# Altium PCB mixer_test.PcbDoc
Units mil, origin at the board's own origin, x right, y up, seen from the top; angles counter-clockwise.
Board outline 1528 x 1869 mil, 4 copper layers (Top Layer, Internal Plane 1, Internal Plane 2, Bottom Layer), stack 29.834 mil thick; 129 components, 64 nets, 342 pads, 250 vias.
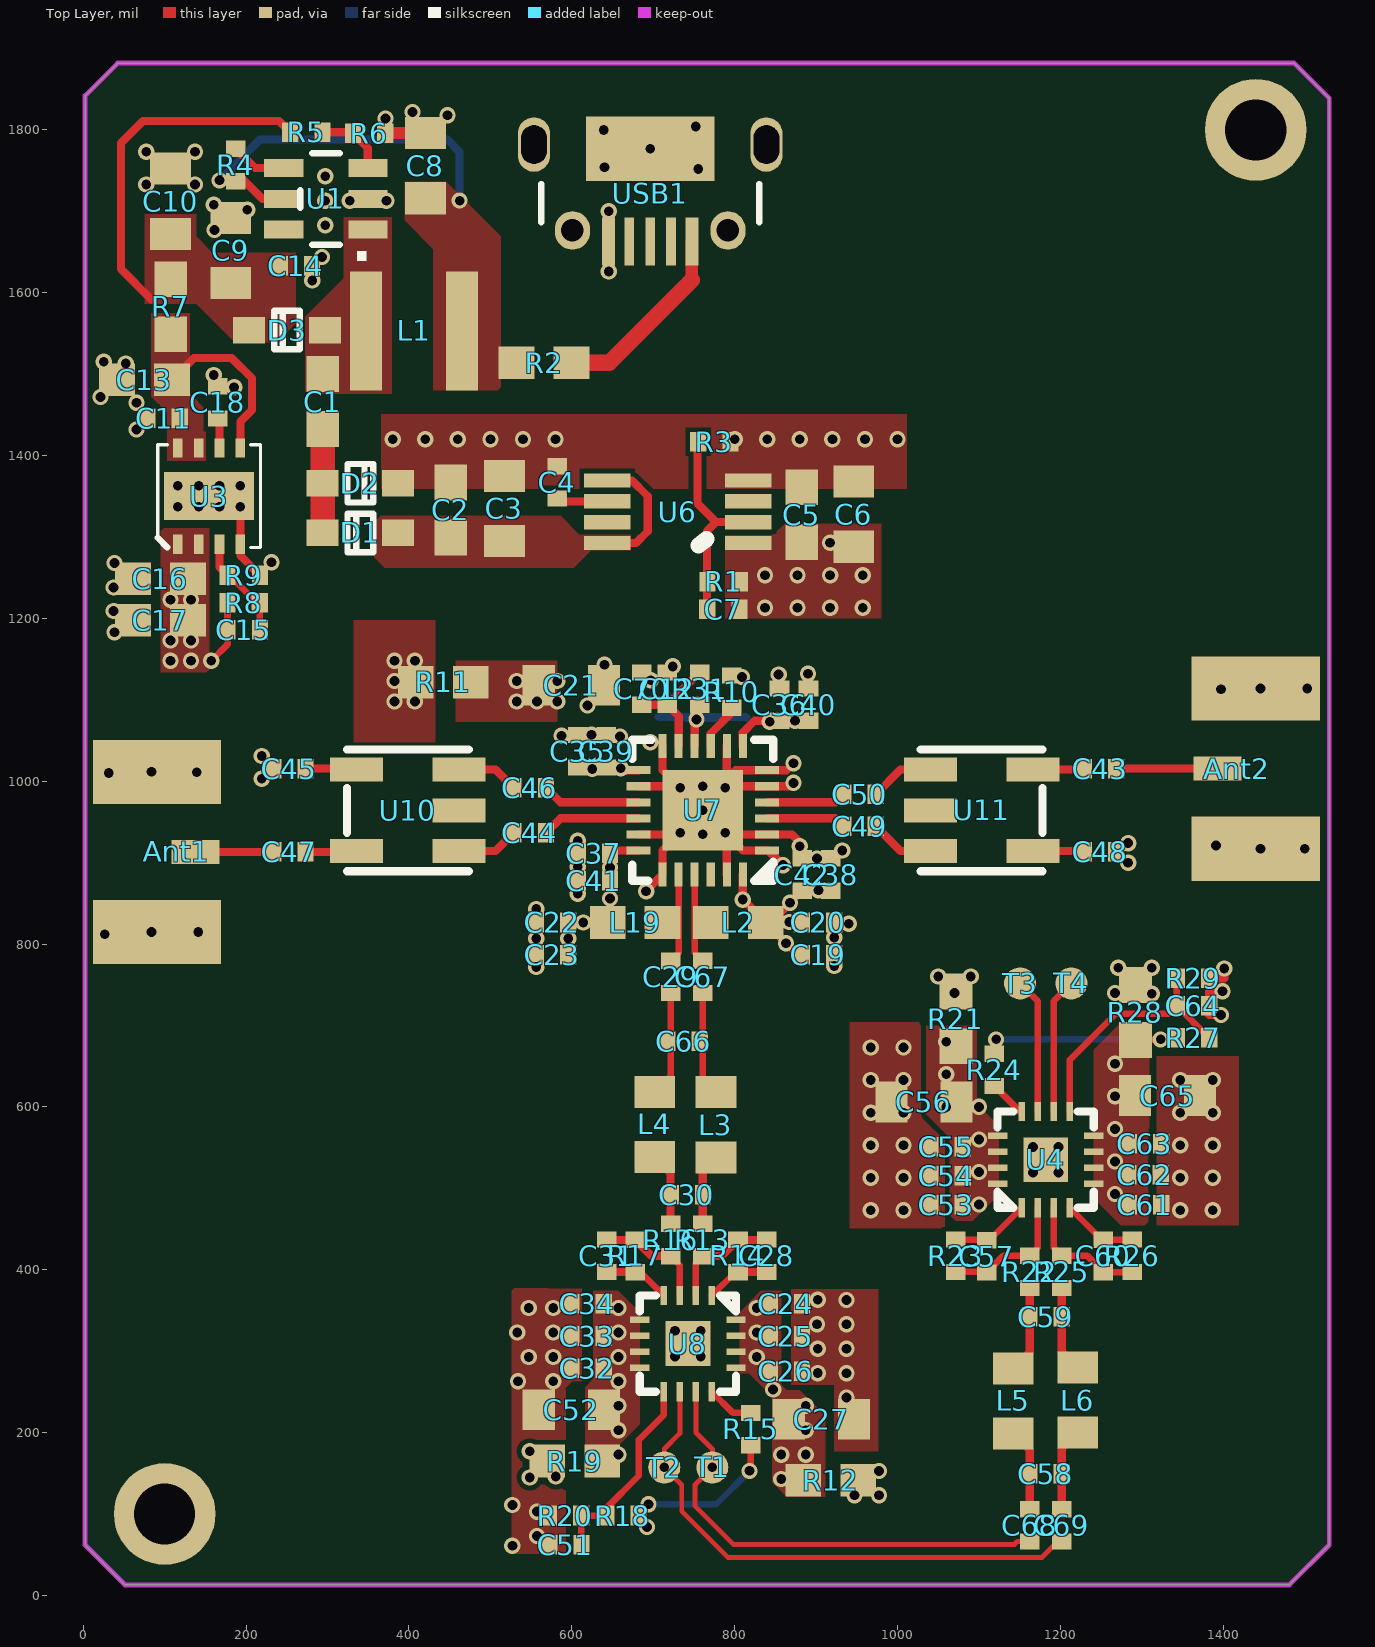
[diagram p0: Top Layer view]
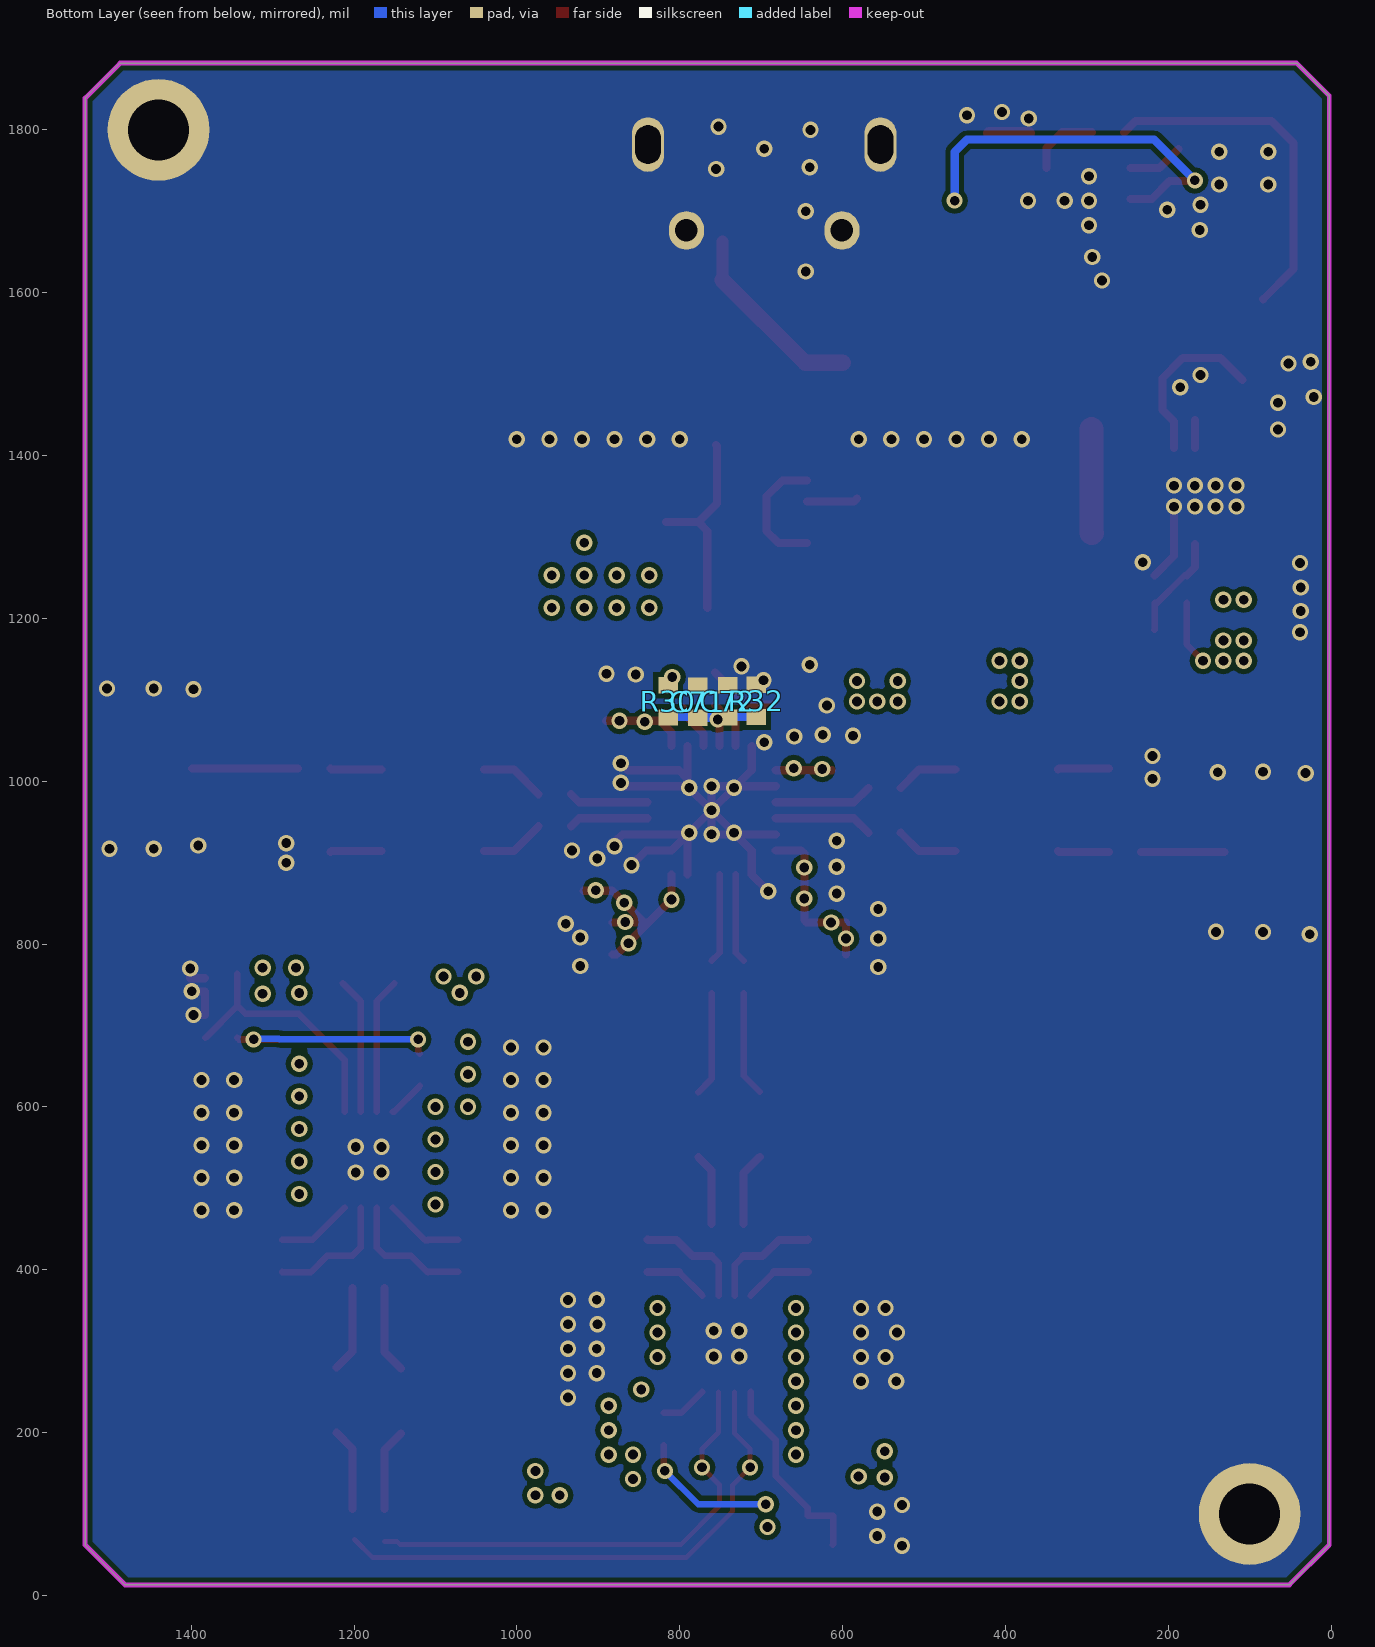
[diagram p1: Bottom Layer view, seen from below]
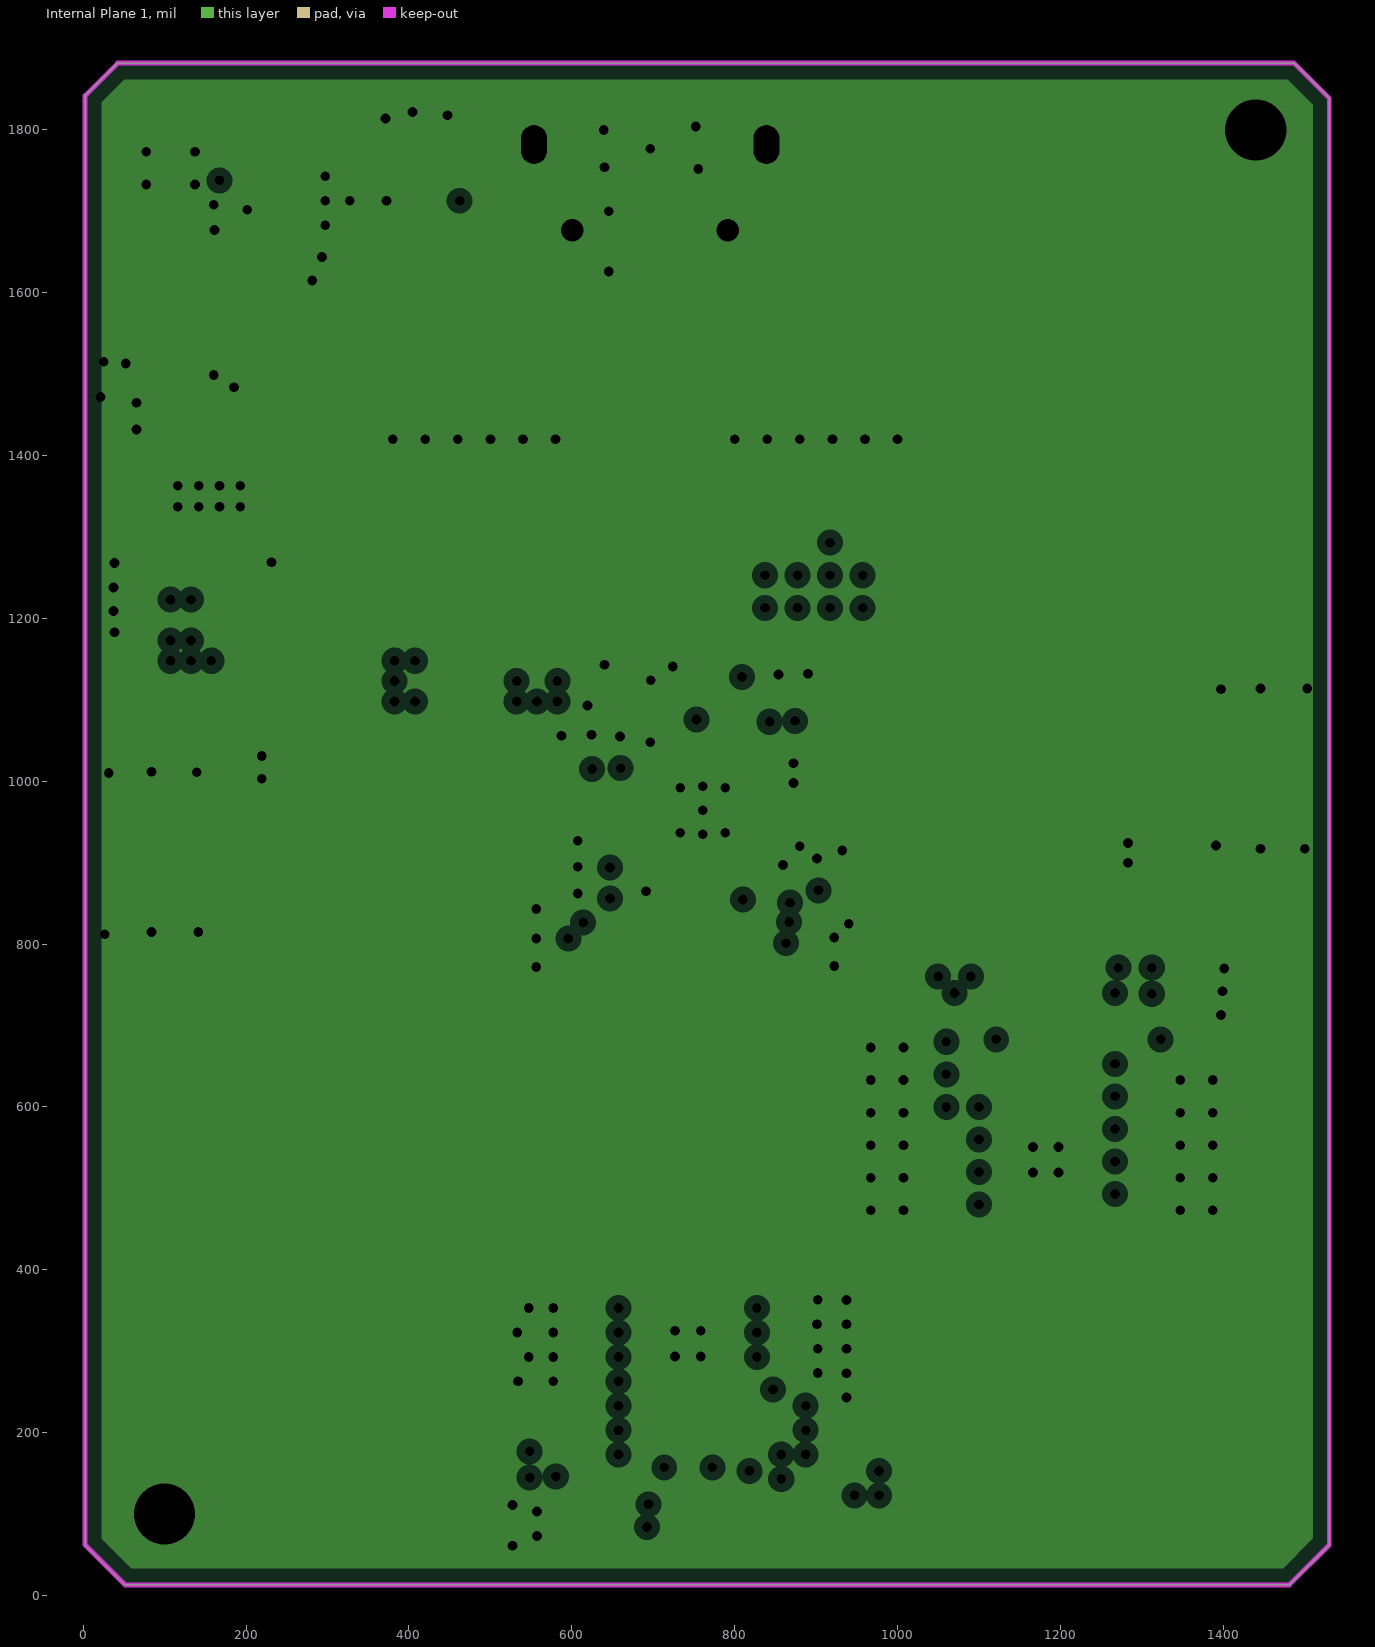
[diagram p2: Internal Plane 1, clearances drawn from the general rule]
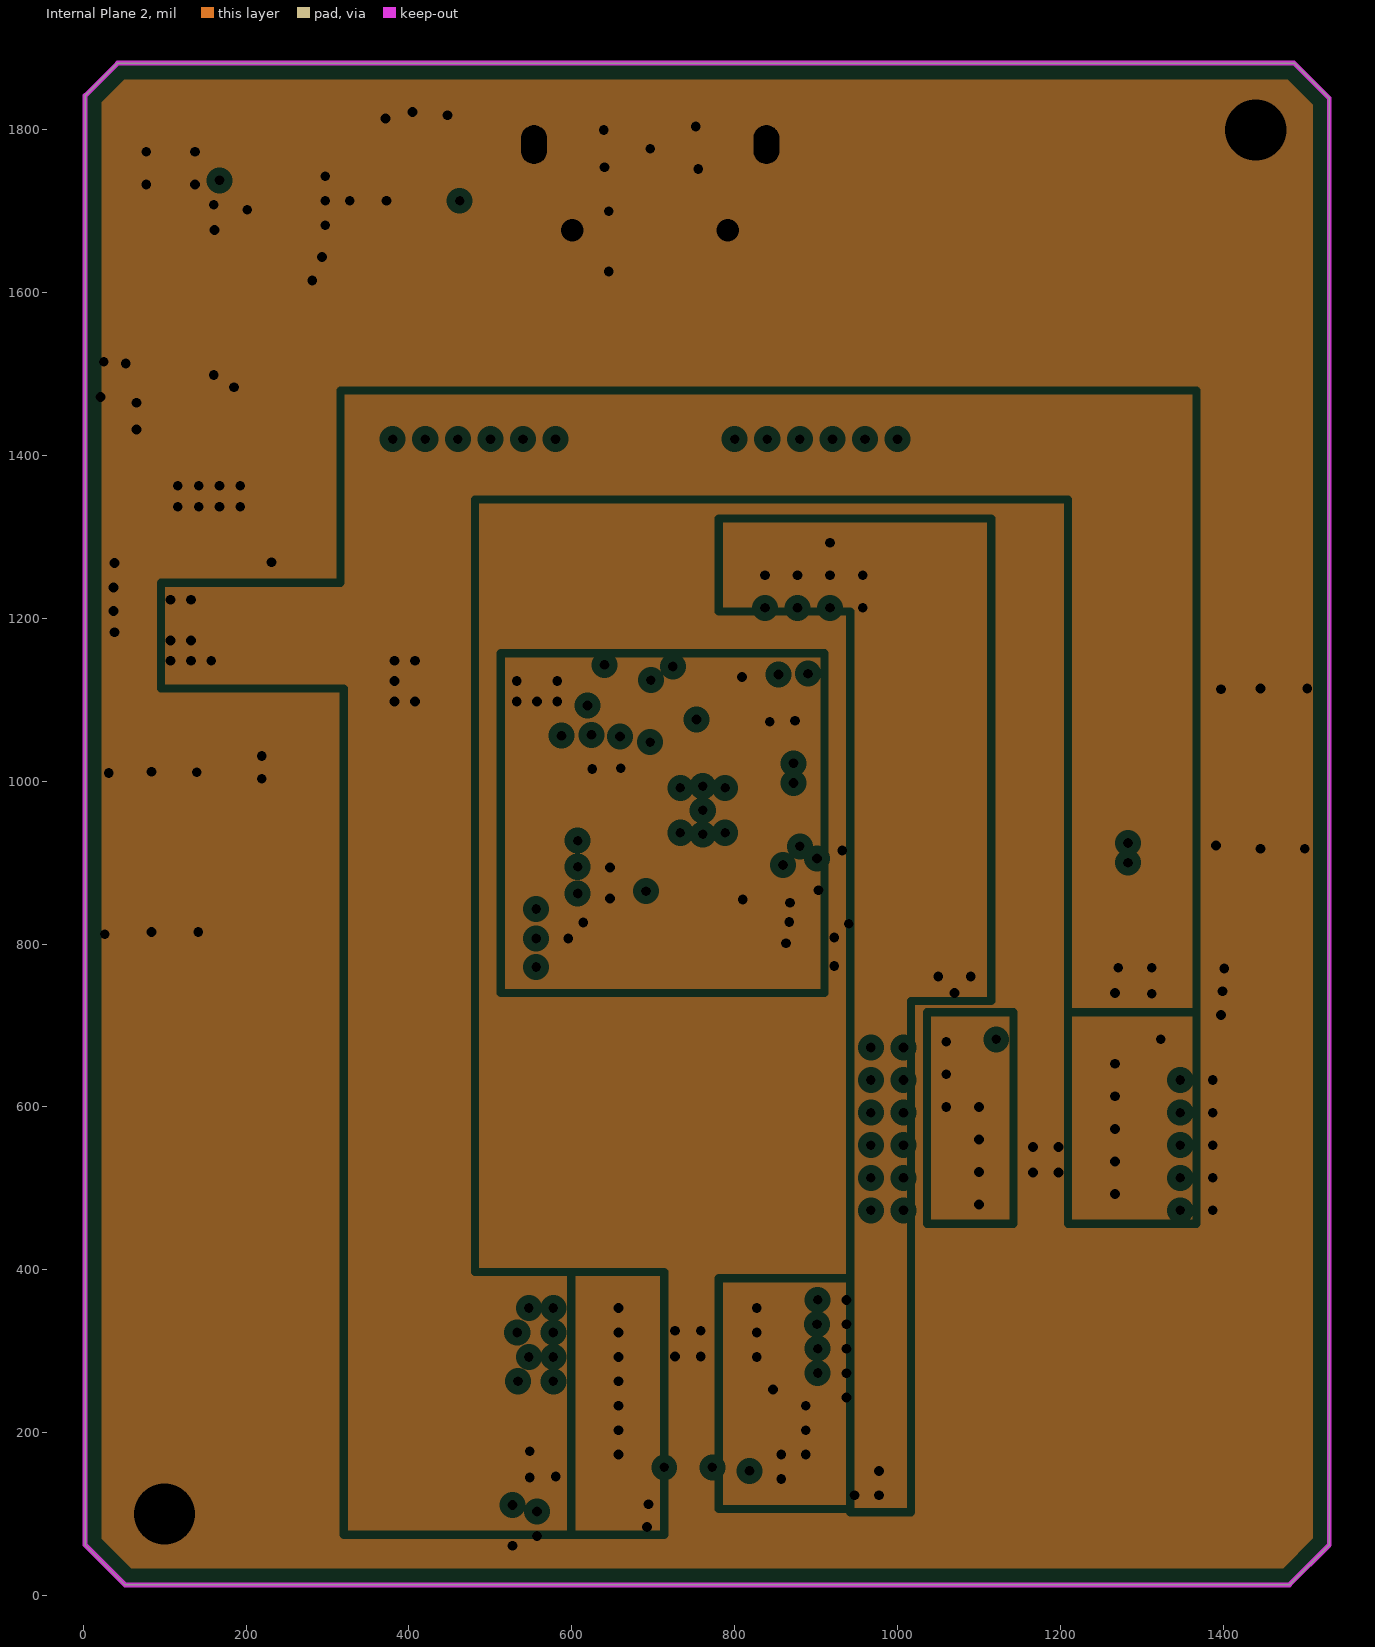
[diagram p3: Internal Plane 2, clearances drawn from the general rule]

## Layer stack, top to bottom
Top Solder: solder mask 0.4, Solder Resist, Dk 3.8
Top Layer: signal copper 1.4
Dielectric 1: prepreg 7.1, Dk 4.6
Internal Plane 1: plane copper 1.417, net GND
Dielectric 3: core 10, Dk 4.6
Internal Plane 2: plane copper 1.417, net GND
Dielectric 4: prepreg 7.1, Dk 4.6
Bottom Layer: signal copper 1.4
Bottom Solder: solder mask 0.4, Solder Resist, Dk 3.8

## Board outline
2.24,61.91 2.24,1841.91 42.24,1881.91 1487.24,1881.91 1530.24,1838.91 1530.24,61.91 1481.24,12.91 51.24,12.91

## Design rules (kind name [scope] priority, off if disabled: settings)
Clearance [All] p1: gap=6
DiffPairsRouting [All] p1: maxlimit=10 minlimit=10 mostfreqgap=10 toplayer_minwidth=5.98 toplayer_maxwidth=15 toplayer_prefwidth=15 bottomlayer_minwidth=5.98 bottomlayer_maxwidth=15 bottomlayer_prefwidth=15 maxuncoupledlength=500
MinimumSolderMaskSliver [All] p1 off: minsoldermaskwidth=10
PlaneClearance [All] p1: clearance=10
PlaneConnect [All] p1: planeconnectstyle=Direct reliefexpansion=20 reliefentries=4 reliefconductorwidth=10 reliefairgap=10
PolygonConnect [All] p1: connectstyle=Direct reliefconductorwidth=10 reliefentries=4 polygonreliefangle="90 Angle" airgapwidth=10
RoomDefinition mixer [InComponentClass('mixer')] p1 off: confinementstyle=ConfineIn formatcopy=TRUE lockcomponents=FALSE outline 2016.24,1719.91 7485.24,1719.91 7485.24,2114.91 2016.24,2114.91
RoomDefinition power [InComponentClass('power')] p2 off: confinementstyle=ConfineIn formatcopy=TRUE lockcomponents=FALSE outline 2012.24,72.91 4357.24,72.91 4357.24,312.91 2012.24,312.91
RoutingVias [All] p1: holewidth=12 width=20 viastyle="Through Hole" minholewidth=11.81 minwidth=19.68 maxholewidth=28 maxwidth=50
SilkToBoardRegionClearance [All] p1 off:
SilkToSilkClearance [All] p1 off: silktosilkclearance=10
SilkToSolderMaskClearance [IsPad] p1 off: minsilkscreentomaskgap=10 clearancetoexposedcopper=TRUE
SolderMaskExpansion [All] p1: expansion=4
UnpouredPolygon [All] p1: allowunpoured=FALSE
Width [All] p1: maxlimit=60 minlimit=6 preferedwidth=6
22 further rules are at their usual default settings.

## Classes and differential pairs
component class mixer: Ant1 Ant2 C12 C19 C20 C21 C22 C23 C24 C25 C26 C27 C28 C29 C30 C31 C32 C33 C34 C35 C36 C37 C38 C39 C40 C41 C42 C43 C44 C45 C46 C47 C48 C49 C50 C51 C52 C53 C54 C55 C56 C57 C58 C59 C60 C61 C62 C63 C64 C65 C66 C67 C68 C69 C70 C71 C72 L2 L3 L4 L5 L6 L19 R10 R11 R12 R13 R14 R15 R16 R17 R18 R19 R20 R21 R22 R23 R24 R25 R26 R27 R28 R29 R30 R31 R32 T1 T2 T3 T4 U4 U7 U8 U10 U11
component class power: C1 C2 C3 C4 C5 C6 C7 C8 C9 C10 C11 C13 C14 C15 C16 C17 C18 D1 D2 D3 L1 R1 R2 R3 R4 R5 R6 R7 R8 R9 U1 U3 U6 USB1
differential pair IF1: +IF1_P -IF1_N
differential pair IF2: +IF2_P -IF2_N

## Components (designator, comment, footprint, x,y, rotation, side; value= is the part's Value field where it differs from the comment)
Ant1 "Antenna" SMA-2 90.62,1011.5 r270 top
Ant2 "Antenna" SMA-2 1440,917.01 r90 top
C1 "1uF" 0603 294.24,1465.91 r90 top
C2 "0.1uF" 0603 451.24,1332.91 r90 top
C3 "10uF" 0805 517.24,1334.91 r270 top
C4 "10nF" 0402 582.24,1366.91 r90 top
C5 "0.1uF" 0603 882.24,1326.91 r90 top
C6 "10uF" 0805 946.24,1327.91 r270 top
C7 "10nF" 0402 786.24,1210.91 r180 top
C8 "10uF" 0805 420.24,1755.91 r270 top
C9 "10uF" 0805 181.24,1651.91 r270 top
C10 "10uF" 0805 107.24,1712.28 r270 top
C11 "0.1uF" 0402 98.49,1445.72 r0 top
C12 "0.1uF" 0402 717.48,1113.86 r270 top
C13 "2.2uF" 0603 74.87,1492.96 r0 top
C14 "0.1uF" 0402 261.24,1632.91 r180 top
C15 "470nF" 0402 196.91,1185.87 r0 top
C16 "0.1uF" 0603 94.55,1248.87 r0 top
C17 "2.2uF" 0603 94.55,1197.69 r0 top
C18 "470nF" 0402 165.42,1465.4 r270 top
C19 "10nF" 0402 902.52,787.09 r180 top
C20 "0.1uF" 0402 902.52,826.46 r180 top
C21 "10uF" 0805 599.37,1117.8 r180 top
C22 "10nF" 0402 575.75,826.46 r0 top
C23 "0.1uF" 0402 575.75,787.09 r0 top
C24 "0.1uF" 0402 863.15,357.95 r180 top
C25 "0.1uF" 0402 863.15,318.58 r180 top
C26 "10nF" 0402 863.15,275.28 r180 top
C27 "10uF" 0805 906.46,216.22 r0 top
C28 "18pF" 0402 839.53,417.01 r90 top
C29 "18pF" 0402 721.42,759.53 r90 top
C30 "270pF" 0402 741.1,491.81 r0 top
C31 "18pF" 0402 642.68,417.01 r90 top
C32 "0.1uF" 0402 619.06,279.21 r0 top
C33 "0.1uF" 0402 619.06,318.58 r0 top
C34 "10nF" 0402 619.06,357.95 r0 top
C35 "0.1uF" 0402 607.24,1036.91 r270 top
C36 "0.1uF" 0402 855.07,1094.17 r270 top
C37 "0.1uF" 0402 626.93,911.21 r0 top
C38 "0.1uF" 0402 918.27,885.51 r270 top
C39 "10nF" 0402 642.24,1036.91 r270 top
C40 "10nF" 0402 890.71,1094.17 r270 top
C41 "10nF" 0402 626.93,877.64 r0 top
C42 "10nF" 0402 882.83,885.51 r270 top
C43 "1nF" 0402 1248.98,1015.43 r180 top
C44 "1nF" 0402 548.19,936.69 r0 top
C45 "10nF" 0402 252.91,1015.43 r0 top
C46 "1nF" 0402 548.19,991.81 r0 top
C47 "1nF" 0402 252.91,913.07 r0 top
C48 "10nF" 0402 1248.98,913.07 r180 top
C49 "1nF" 0402 953.7,944.57 r180 top
C50 "1nF" 0402 953.7,983.94 r180 top
C51 "0.1uF" 0402 591.89,62.45 r0 top
C52 "10uF" 0805 599.37,228.03 r180 top
C53 "0.1uF" 0402 1060,480 r0 top
C54 "0.1uF" 0402 1060,515.43 r0 top
C55 "10nF" 0402 1060,550.87 r0 top
C56 "10uF" 0805 1032.44,605.98 r180 top
C57 "18pF" 0402 1109.52,416.61 r270 top
C58 "18pF" 0402 1182.05,149.29 r180 top
C59 "270pF" 0402 1182.05,342.2 r180 top
C60 "18pF" 0402 1252.91,417.01 r270 top
C61 "0.1uF" 0402 1304.09,480 r180 top
C62 "0.1uF" 0402 1303.7,516.67 r180 top
C63 "10nF" 0402 1304.09,554.8 r180 top
C64 "0.1uF" 0402 1363.15,724.09 r180 top
C65 "10uF" 0805 1331.65,613.86 r0 top
C66 "18pF" 0402 737.17,680.79 r0 top
C67 "18pF" 0402 760.79,759.53 r90 top
C68 "18pF" 0402 1162.36,86.3 r270 top
C69 "18pF" 0402 1201.73,86.3 r270 top
C70 "100pF" 0402 685.98,1113.86 r270 top
C71 "0.1uF" 0402 777.82,1097.96 r270 bottom
C72 "100pF" 0402 741.1,1098.11 r270 bottom
D1 "Diode 1N4148" LC-SOD-323 340.24,1304.91 r0 top
D2 "Diode 1N4148" LC-SOD-323 340.24,1365.91 r180 top
D3 "Diode" LC-SOD-323 250.24,1553.91 r0 top
L1 "10uH" L4015 465.24,1552.91 r180 top
L2 "Inductor" 0603 804.09,826.46 r0 top
L3 "Inductor" 0805 776.99,578.06 r270 top
L4 "Inductor" 0805 701.73,578.43 r270 top
L5 "Inductor" 0805 1142.22,238.77 r90 top
L6 "Inductor" 0805 1221.42,239.84 r90 top
L19 "Inductor" 0603 678.11,826.46 r180 top
R1 "17k" 0402 786.24,1244.91 r0 top
R2 "FB" 0603 566.24,1513.91 r180 top
R3 "10k" 0402 775.24,1416.91 r180 top
R4 "45k" 0402 187.24,1756.91 r270 top
R5 "91k" 0402 274.24,1796.91 r180 top
R6 "10k" 0402 351.24,1795.91 r180 top
R7 "FB" 0603 107.24,1582.36 r90 top
R8 "6.25k" 0402 196.8,1219.24 r0 top
R9 "10k" 0402 196.91,1252.8 r0 top
R10 "Res2" 0402 796.22,1109.92 r90 top
R11 "FB" 0603 441.89,1121.73 r0 top
R12 "FB" 0603 918.27,141.42 r180 top
R13 "Res2" 0402 760.79,436.69 r270 top
R14 "Res2" 0402 804.09,417.01 r270 top
R15 "Res2" 0402 819.84,204.41 r270 top
R16 "Res2" 0402 721.42,436.69 r270 top
R17 "Res2" 0402 678.11,417.01 r270 top
R18 "Res2" 0402 662.36,98.11 r0 top
R19 "FB" 0603 603.31,165.04 r0 top
R20 "Res2" 0402 591.5,98.11 r0 top
R21 "FB" 0603 1071.81,708.35 r270 top
R22 "Res2" 0402 1162.36,397.32 r90 top
R23 "Res2" 0402 1071.81,417.01 r90 top
R24 "Res2" 0402 1119.06,645.35 r90 top
R25 "Res2" 0402 1201.73,397.32 r90 top
R26 "Res2" 0402 1288.35,417.01 r90 top
R27 "Res2" 0402 1363.15,684.72 r180 top
R28 "FB" 0603 1292.28,716.22 r270 top
R29 "Res2" 0402 1363.24,757.91 r180 top
R30 "Res2" 0402 814.24,1097.91 r90 bottom
R31 "Res2" 0402 756.85,1113.86 r270 top
R32 "Res2" 0402 706.24,1098.91 r270 bottom
T1 "TestPad" "TestPad - 1mm" 772.6,157.17 r270 top
T2 "TestPad" "TestPad - 1mm" 713.54,157.17 r270 top
T3 "TestPad" "TestPad - 1mm" 1150.55,751.65 r270 top
T4 "TestPad" "TestPad - 1mm" 1213.54,751.65 r270 top
U1 "SY7152" SOT23-6 298.24,1714.91 r90 top
U3 "TPS7A8101" TPS7A8101 154.49,1350.08 r90 top
U4 "ADA4932-1" ADA4932-1 1182.05,535.12 r90 top
U6 "tps7a3001" MSOP8/VSSOP8 730.24,1330.91 r180 top
U7 "ADL5801" ADL5801 760.79,964.25 r180 top
U8 "ADA4932-1" ADA4932-1 742.48,309.21 r270 top
U10 "TCM1-1-13M+" TCM-63AX+ 398.58,964.25 r270 top
U11 "TCM1-1-13M+" TCM-63AX+ 1103.31,964.25 r90 top
USB1 "USB Micro Type B" MICRO-YZX 696.24,1892.91 r180 top

## Footprints (in the part's own frame and the unit in brackets; to place one, negate y for a bottom-side part, rotate by r counter-clockwise, add the part's x,y. Pads: shape width x height; smd on the part's side, far side on the other; paste and mask are expansions set on the pad)
0402 [mil] "0402-RES"
  rect 20x24 smd: 1(-19.69,0) 2(20,0)
0603 [mil] "0603-RES"
  rect 44x40 smd: 1(-33.46,0) 2(34,0)
0805 [mil]
  rect 39.37x50 smd: 1(-40,0) 2(40,0)
  body extent -50,-30 50,30, height 31
ADA4932-1 [mm]
  rect 1.4x1.4 smd: 0(0,0)
  rect 0.6x0.2 smd: 1(-1.5,0.75) 2(-1.5,0.25) 3(-1.5,-0.25) 4(-1.5,-0.75) 9(1.5,-0.75) 10(1.5,-0.25) 11(1.5,0.25) 12(1.5,0.75)
  rect 0.2x0.6 smd: 5(-0.75,-1.5) 6(-0.25,-1.5) 7(0.25,-1.5) 8(0.75,-1.5) 13(0.75,1.5) 14(0.25,1.5) 15(-0.25,1.5) 16(-0.75,1.5)
  silkscreen extent -1.5,-1.5 1.5,1.5, body extent -1.5,-1.5 1.5,1.5, height 0.7
ADL5801 [mm]
  rect 2.5x2.5 smd: 0(0,0)
  rect 0.75x0.25 smd: 1(-2,1.25) 2(-2,0.75) 3(-2,0.25) 4(-2,-0.25) 5(-2,-0.75) 6(-2,-1.25) 13(2,-1.25) 14(2,-0.75) 15(2,-0.25) 16(2,0.25) 17(2,0.75) 18(2,1.25)
  rect 0.25x0.75 smd: 7(-1.25,-2) 8(-0.75,-2) 9(-0.25,-2) 10(0.25,-2) 11(0.75,-2) 12(1.25,-2) 19(1.25,2) 20(0.75,2) 21(0.25,2) 22(-0.25,2) 23(-0.75,2) 24(-1.25,2)
  silkscreen extent -2.2,-2.2 2.2,2.2, body extent -2,-2 2,2, height 0.85
L4015 [mm]
  rect 1x3.7 smd: 1(0,0) 2(3,0)
LC-SOD-323 [mm]
  rect 1x0.83 smd: 1(1.18,0) 2(-1.18,0)
  silkscreen extent -0.4,-0.6 0.4,0.6, body extent -1.35,-0.62 1.35,0.63, height 1.1
MICRO-YZX [mm]
  rect 0.4x1.5 smd: 1(-1.3,5.85) 5(1.3,5.85)
  rect 0.3x1.5 smd: 2(-0.65,5.85) 3(0,5.85) 4(0.65,5.85)
  oval 1x1.7 hole 0.8 slot 1.2 at 90 deg: 5(-3.625,2.82) 5(3.625,2.82)
  oval 1.1x1.2 hole 0.7: 5(-2.425,5.5) 5(2.425,5.5)
  rect 4x2 smd: 5(0,2.95)
  silkscreen extent -3.4,4.05 3.4,5.25, body extent -4.02,0.33 3.98,5.93, height 2.6
MSOP8/VSSOP8 [mm]
  rect 1.45x0.45 smd: 1(-2.2,0.975) 2(-2.2,0.325) 3(-2.2,-0.325) 4(-2.2,-0.975) 5(2.2,-0.975) 6(2.2,-0.325) 7(2.2,0.325) 8(2.2,0.975)
  silkscreen extent -0.9,0.85 -0.65,1.05
SMA-2 [mm]
  rect 0.75x1.5 smd: 1(2.5,1.2)
  rect 2x4 smd: GND(0,0) GND(5,0)
  Top Layer pour cut-out: 1,2 4,2 4,-2 1,-2
SOT23-6 [mil] "SOT23-5"
  rect 22x48 smd: 1(-37.4,-51.18) 2(0,-51.18) 3(38,-51.18) 4(38,52) 5(0,52.01) 6(-37.4,52)
  silkscreen extent -76,-50 56,32
TCM-63AX+ [mm]
  rect 0.75x1.65 smd: 1(-1.27,1.6) 2(0,1.6) 3(1.27,1.6) 4(1.27,-1.6) 5(-1.27,-1.6)
  silkscreen extent -1.9,-1.9 1.9,1.9
"TestPad - 1mm" [mm]
  round 1 smd: 1(0,0)
TPS7A8101 [mm]
  rect 1.5x2.8 smd: 0(0,0)
  rect 0.6x0.3 smd: 1(-1.5,0.975) 2(-1.5,0.325) 3(-1.5,-0.325) 4(-1.5,-0.975) 5(1.5,-0.975) 6(1.5,-0.325) 7(1.5,0.325) 8(1.5,0.975)
  silkscreen extent -1.6,-1.6 1.6,1.6, body extent -1.5,-1.5 1.5,1.5, height 0.6

## Part data
C1 C2 C3 C4 C5 C6 C7 C8 C9 C10 C15 C21 C27 C52 C56 C65: library part Cap, "Capacitor"
C11 C12 C13 C14 C16 C17 C18 C19 C20 C22 C23 C24 C25 C26 C28 C29 C30 C31 C32 C33 C34 C35 C36 C37 C38 C39 C40 C41 C42 C43 C44 C45 C46 C47 C48 C49 C50 C51 C53 C54 C55 C57 C58 C59 C60 C61 C62 C63 C64 C66 C67 C68 C69 C70 C71 C72: library part CAP0402-CAP, "<b>Capacitor</b> / Standard 0603 ceramic capacitor, and 0.1\" leaded capacitor."
D1 D2: "High Conductance Fast Diode"
D3: "Default Diode"
L1: library part Inductor, "Inductor"
R1 R2 R3 R4 R5 R6 R7 R8 R9 R11 R12 R19 R21 R28: library part Res2, "Resistor"
R10 R13 R14 R15 R16 R17 R18 R20 R22 R23 R24 R25 R26 R27 R29 R30 R31 R32: "Resistor"
U10 U11: library part TCM-63AX+
USB1: library part USB_Micro_TypeB, "Connector SMD USB Micro Type B middle mount"

## Free pads (board coordinates)
  round 125 hole 75: 0(100,100) 1(1440,1800)

## Via types
v1: diameter 20, hole 12, Top Layer to Bottom Layer, tented both sides, 235 vias
v2: diameter 19.68, hole 11.81, Top Layer to Bottom Layer, tented both sides, 15 vias

## Nets (pads, with @x,y where several pads share a name; then routed paths per layer and width w, separated by ;. In a path a pad name is that pad's centre, name@x,y a point inside that pad or via, vN(x,y) a via of type N, cw(c..) or ccw(c..) an arc to the next point about the centre after c; other vN are vias at no path point)
5V: C15.1 C16.2 C17.2 R8.1 R11.1 R19.1 R28.1 U3.1 U3.2 | length 79.7
  Top Layer w8: v1(157.24,1147.91) 177.23,1167.9 C15.1 177.12,1185.98 R8.1
  other v1: 548.24,144.91 580.24,145.91 548.24,176.91 1312.24,738.91 1267.24,739.91 1271.24,770.91 1312.24,770.91 382.24,1097.91 407.24,1097.91 382.24,1122.91 107.24,1147.91 132.24,1147.91 382.24,1147.91 407.24,1147.91 107.24,1172.91 132.24,1172.91 107.24,1222.91 132.24,1222.91
5V-MIXER: C19.2 C20.2 C21.2 C22.2 C23.2 C35.2 C36.2 C37.2 C38.2 C39.2 C40.2 C41.2 C42.2 L2.2 L19.2 R10.2 R11.2 R30.2 U7.7 U7.13 U7.18 U7.24 | length 649.5
  Top Layer w10: C23.2 C22.2 L19.2 646.93,829.28 C37.2 650.76,915.04 U7.18 ; C35.2@612.83,1013.46 U7.13 ; U7.24 v1(810,854.55) L2.2 ; U7.7 810,1059.67 824.5,1074.17 C40.2 ; C19.2 877.46,787.09 L2.2 ; C20.2 L2.2@843.78,826.46 ; C38.2 C42.2 L2.2@843.78,826.46 ; L2.2 L2.2@843.78,826.46
  other v1: 863,801 595.75,806.77 614,826.46 867,827 868,850.68 647,856 903,866 646.93,894 625,1015 660,1016 843,1073 874,1074.17 532.24,1097.91 557.24,1097.91 582.24,1097.91 532.24,1122.91 582.24,1122.91 809,1128
5VA: C32.2 C33.2 C34.2 C52.1 R15.2 R18.2 R19.2 U8.5 U8.6 U8.7 U8.8 | length 173.1
  Top Layer w8: v2(818.24,152.91) 819.84,154.51 R15.2
  Bottom Layer w8: v1(694.24,111.91) 777.24,111.91 v2(818.24,152.91)
  other v1: 692.24,83.91 657.24,172.91 657.24,202.91 657.24,232.91 657.24,262.91 657.24,292.91 657.24,322.91 657.24,352.91
5VB: C61.2 C62.2 C63.2 C65.1 R24.2 R27.2 R28.2 U4.5 U4.6 U4.7 U4.8 | length 291.3
  Top Layer w8: R24.2 1121.24,667.54 v2(1121.24,682.91) ; R28.2 1340.65,682.22 R27.2@1341.34,682.91 ; v2(1323.24,682.91) R27.2@1341.34,682.91 ; R27.2 R27.2@1341.34,682.91
  Bottom Layer w8: v2(1121.24,682.91) 1291.24,682.91 1292.24,683.91 1322.24,683.91 v2(1323.24,682.91)
  other v1: 1267.24,492.91 1267.24,532.91 1267.24,572.91 1267.24,612.91 1267.24,652.91
6V: C9.2 C10.2 C14.2 D3.2 R5.2 R7.2 | length 432.3
  Top Layer w10: 83.24,1591.91 46.24,1628.91 46.24,1783.91 73.24,1810.91 240.24,1810.91 R5.2
-3.3V: C5.1 C6.2 C7.1 R1.2 R12.1 R21.1 U6.1
  other v1: 947.24,122.91 977.24,122.91 977.24,152.91 1070,740 1050,760 1090,760 837.24,1212.91 877.24,1212.91 917.24,1212.91 957.24,1212.91 837.24,1252.91 877.24,1252.91 917.24,1252.91 957.24,1252.91 917.24,1292.91
DETO: C12.2 C70.2 R31.1 U7.11 | length 144.1
  Top Layer w10: C70.2 C12.2 ; U7.11 731.26,1080.08 C12.2 ; R31.1 717.48,1094.17 C12.2
GND: Ant1.GND Ant2.GND C2.2 C3.1 C4.2 C5.2 C6.1 C8.1 C9.1 C10.1 C11.1 C12.1 C13.1 C14.1 C16.1 C17.1 C18.1 C19.1 C20.1 C21.1 C22.1 C23.1 C24.1 C25.1 C26.1 C27.2 C32.1 C33.1 C34.1 C35.1 C36.1 C37.1 C38.1 C39.1 C40.1 C41.1 C42.1 C45.1 C48.1 C51.1 C52.2 C53.1 C54.1 C55.1 C56.2 C61.1 C62.1 C63.1 C64.1 C65.2 C70.1 C71.1 C72.1 D2.2 pad.0 pad.1 R3.1 R6.1 R9.2 R20.1 R29.1 R32.1 U1.2 U3.0 U3.4 U4.0 U6.4 U7.0 U7.1 U7.2 U7.5 U7.6 U7.8 U7.12 U7.14 U7.17 U7.19 U7.23 U8.0 USB1.5 | length 1216.5
  Top Layer w10: v2(192.87,1337.28) U3.4 192.87,1276.84 R9.2 ; U7.17 U7.0@731.26,934.72 ; U7.14 U7.0@731.26,993.78 ; v1(691.24,864.91) 711.57,885.24 U7.19 711.57,915.04 U7.0@731.26,934.72 ; U7.12 711.57,1013.46 U7.0@731.26,993.78 ; U7.23 U7.0@790.32,934.72 ; U7.8 U7.0@790.32,1002.91 ; v1(859.24,896.91) 841.12,915.04 U7.1 810,915.04 U7.0@790.32,934.72 ; v1(872.24,997.91) 868.11,993.78 U7.5 U7.0@790.32,993.78 ; v1(872.24,1021.91) 863.8,1013.46 U7.6 800.87,1013.46 U7.0@790.32,1002.91 ; v1(880,920) 880,925.16 870.43,934.72 U7.2 U7.0@790.32,934.72 ; R29.1 1401.24,757.91 v1(1401.24,769.91) ; v1(1397.24,712.91) 1382.83,712.91 C64.1 1382.83,741.91 v1(1399.24,741.91) ; U7.0@731.26,934.72 v1(760.79,934.72) v1(760.79,964.25) ; U7.0@731.26,934.72 v1(733.23,936.69) v1(760.79,964.25) ; U7.0@731.26,993.78 v1(760.79,993.78) v1(760.79,964.25) ; U7.0@731.26,993.78 v1(733.23,991.81) v1(760.79,964.25) ; v1(760.79,964.25) v1(788.35,936.69) U7.0@790.32,934.72 ; v1(760.79,964.25) v1(788.35,991.81) U7.0@790.32,993.78 ; U7.0@790.32,993.78 U7.0@790.32,1002.91
  Top Layer w15: R6.1 C8.1
  other v1: 527,61 557.24,72.91 557.24,102.91 527,111 937.24,242.91 534,263 577.24,262.91 902,273 937.24,272.91 547.24,292.91 577.24,292.91 726.73,293.46 758.23,293.46 902,303 937.24,302.91 533,323 577.24,322.91 726.73,324.96 758.23,324.96 901,333 937.24,332.91 547.24,352.91 577.24,352.91 902,363 937.24,362.91 967.24,472.91 1007.24,472.91 1347.24,472.91 1387.24,472.91 967.24,512.91 1007.24,512.91 1347.24,512.91 1387.24,512.91 1166.3,519.37 1197.8,519.37 1166.3,550.87 1197.8,550.87 967.24,552.91 1007.24,552.91 1347.24,552.91 1387.24,552.91 967.24,592.91 1007.24,592.91 1347.24,592.91 1387.24,592.91 967.24,632.91 1007.24,632.91 1347.24,632.91 1387.24,632.91 967.24,672.91 1007.24,672.91 556.24,771.91 922.24,772.91 556.24,806.91 922.24,807.91 26.24,811.91 83.62,814.65 141.24,814.91 940,825 556.24,842.91 607.24,861.91 607.24,894.91 1283.24,899.91 901.24,904.91 932.24,914.91 1445.83,917.01 1500.24,916.91 1391.24,920.91 1283.24,923.91 607.24,926.91 219.24,1002.91 31.24,1009.91 139.24,1010.91 83.62,1011.5 219.24,1030.91 696.24,1047.91 659.24,1054.91 587.24,1055.91 624.24,1056.91 619.24,1092.91 1397.24,1112.91 1445.83,1113.86 1503.24,1113.91 697,1124 854,1131 890,1132 724,1141 640.24,1142.91 38.24,1182.91 37.24,1208.91 37.24,1237.91 38.24,1267.91 231.24,1268.91 380,1420 420,1420 460,1420 500,1420 540,1420 580,1420 800,1420 840,1420 880,1420 920,1420 960,1420 1000,1420 65.24,1431.91 65.24,1464.91 21.24,1471.91 185.24,1483.91 160.24,1498.91 52.24,1512.91 25,1515 281.24,1614.91 645.24,1625.91 293.24,1643.91 161.24,1676.91 297.24,1682.91 645.24,1699.91 201.24,1701.91 160.24,1707.91 297.24,1712.91 327.24,1712.91 372.24,1712.91 77.24,1732.91 137.24,1732.91 297.24,1742.91 755.24,1751.91 640.24,1753.91 77.24,1772.91 137.24,1772.91 696.24,1776.77 639.24,1799.91 752.24,1803.91 371.24,1813.91 447.24,1817.91 404.24,1821.91
  other v2: 116.1,1337.28 141.69,1337.28 167.28,1337.28 116.1,1362.87 141.69,1362.87 167.28,1362.87 192.87,1362.87
IF1_N: C29.2 L19.1 U7.20 | length 110.1
  Top Layer w8: C29.2 731.26,789.37 U7.20
IF1_P: C67.2 L2.1 U7.21 | length 110.1
  Top Layer w8: U7.21 750.94,789.37 C67.2
IF2_N: C68.2 T1.1 U8.11 | length 589.9
  Top Layer w6: U8.11 752.32,200.13 772.6,179.85 v2(772.6,157.17) 751.07,135.64 751.07,109.92 798.32,62.68 1143.74,62.68 1147.36,66.3 C68.2
IF2_P: C69.2 T2.1 U8.10 | length 660.6
  Top Layer w6: U8.10 732.64,198.94 713.54,179.85 v2(713.54,157.17) 735.07,135.64 735.07,103.29 791.69,46.68 1177.47,46.68 C69.2@1199.41,68.62
IF3+: T4.1 U4.10 | length 166.4
  Top Layer w8: U4.10 1191.89,730 T4.1
IF3-: T3.1 U4.11 | length 166.4
  Top Layer w8: T3.1 1172.2,730 U4.11
NetAnt1_1: Ant1.1 C47.1 | length 102.4
  Top Layer w10: Ant1.1@130.87,913.07 C47.1
NetAnt2_1: Ant2.1 C43.1 | length 129.9
  Top Layer w10: C43.1 Ant2.1@1398.58,1015.43
NetC1_1: C1.1 D1.2 D2.1 | length 127.7
  Top Layer w30: D1.2 294.24,1305.37 C1.1
NetC1_2: C1.2 D3.1 L1.2 U1.1
NetC2_1: C2.1 C3.2 D1.1 U6.5 U6.8 | length 156.2
  Top Layer w10: U6.8 678.86,1292.53 693.24,1306.91 693.24,1349.91 673.86,1369.3 U6.5
NetC4_1: C4.1 U6.6 | length 62.8
  Top Layer w10: C4.1 585.76,1343.71 U6.6
NetC7_2: C7.2 R1.1 R3.2 U6.2 | length 254.4
  Top Layer w10: R3.2@755.24,1412.91 754.24,1411.91 754.24,1340.91 777.04,1318.12 ; C7.2@765.8,1212.85 766.12,1213.17 766.12,1247.85 766.12,1307.2 777.04,1318.12 ; U6.2 777.04,1318.12
NetC11_2: C11.2 C13.2 R7.1 U3.5 U3.7 U3.8 | length 211.6
  Top Layer w10: C13.2 135.82,1519.91 182.24,1519.91 207.24,1494.91 207.24,1455.91 192.87,1441.54 U3.5
NetC15_2: C15.2 R8.2 R9.1 U3.3 | length 128.2
  Top Layer w8: R9.1 179.7,1252.8 R8.2@215.03,1217.47 ; R8.2 216.8,1185.98 C15.2
  Top Layer w10: U3.3 167.28,1262.75 R9.1
NetC18_2: C18.2 U3.6 | length 34.4
  Top Layer w10: U3.6 C18.2@167.28,1443.54
NetC24_2: C24.2 C25.2 C26.2 C27.1 R12.2 U8.13 U8.14 U8.15 U8.16
  other v1: 857.24,142.91 857.24,172.91 887.24,172.91 887.24,202.91 887.24,232.91 847.24,252.91 827.24,292.91 827.24,322.91 827.24,352.91
NetC28_1: C28.1 R14.2 U8.1 | length 79.6
  Top Layer w8: U8.1 R14.2@800.75,397.01
  Top Layer w10: R14.2@800.75,397.01 R14.2 839.21,397.01 C28.1
NetC28_2: C28.2 R13.2 R14.1 U8.2 | length 139.1
  Top Layer w8: U8.2 752.32,408.23 R13.2
  Top Layer w10: R13.2 784.09,416.69 R14.1 839.21,436.69 C28.2
NetC29_1: C29.1 C66.1 L4.1 | length 129.6
  Top Layer w8: L4.1 721.42,638.11 C29.1
NetC30_1: C30.1 L4.2 R16.1 | length 90.2
  Top Layer w10: L4.2 721.42,518.74 C30.1 R16.1
NetC30_2: C30.2 L3.2 R13.1 | length 88.4
  Top Layer w10: R13.1 760.79,521.86 L3.2
NetC31_1: C31.1 R17.2 U8.4 | length 82.3
  Top Layer w8: R17.2@684.21,397.01 U8.4
  Top Layer w10: C31.1 642.99,397.01 R17.2 R17.2@684.21,397.01
NetC31_2: C31.2 R16.2 R17.1 U8.3 | length 140.2
  Top Layer w8: R16.2 732.64,405.47 U8.3
  Top Layer w10: C31.2 642.99,436.69 R17.1 698.11,416.69 R16.2
NetC43_2: C43.2 U11.4 | length 63.2
  Top Layer w10: U11.4 1227.8,1014.25 C43.2
NetC44_1: C44.1 U10.3 | length 76.2
  Top Layer w10: U10.3 506.06,914.25 C44.1
NetC44_2: C44.2 U7.16 | length 121.2
  Top Layer w10: C44.2 585.91,954.41 U7.16
NetC45_2: C45.2 U10.5 | length 63.2
  Top Layer w10: C45.2 334.41,1015.43 U10.5
NetC46_1: C46.1 U10.1 | length 76.2
  Top Layer w10: U10.1 506.06,1014.25 C46.1
NetC46_2: C46.2 U7.15 | length 121.2
  Top Layer w10: C46.2 585.91,974.09 U7.15
NetC47_2: C47.2 U10.4 | length 63.2
  Top Layer w10: C47.2 334.41,913.07 U10.4
NetC48_2: C48.2 U11.5 | length 63.2
  Top Layer w10: U11.5 1227.8,914.25 C48.2
NetC49_1: C49.1 U11.1 | length 79.5
  Top Layer w10: C49.1 1003.7,914.25 U11.1
NetC49_2: C49.2 U7.3 | length 98.3
  Top Layer w10: U7.3 923.86,954.41 C49.2
NetC50_1: C50.1 U11.3 | length 79.5
  Top Layer w10: C50.1 1003.7,1014.25 U11.3
NetC50_2: C50.2 U7.4 | length 98.3
  Top Layer w10: U7.4 923.86,974.09 C50.2
NetC51_2: C51.2 R18.1 R20.2 U8.9 | length 248.2
  Top Layer w8: C51.2 611.5,62.84 R20.2 R18.1 642.68,107.35 682.24,146.91 682.24,190.91 712.95,221.62 U8.9
NetC53_2: C53.2 C54.2 C55.2 C56.1 R21.2 U4.13 U4.14 U4.15 U4.16
  other v1: 1100,480 1100,520 1100,560 1060,600 1100,600 1060,640 1060,680
NetC57_1: C57.1 R23.2 U4.1 | length 97.5
  Top Layer w8: R23.2 1108.81,437.01 C57.1 1112.76,436.3 U4.1
NetC57_2: C57.2 R22.2 R23.1 U4.2 | length 162.2
  Top Layer w8: R23.1 1108.81,397.32 C57.2 1130.23,417.32 R22.2 1172.2,427.17 U4.2
NetC58_1: C58.1 C69.1 L6.1 | length 102
  Top Layer w10: C69.1 1201.73,180.16 L6.1
NetC58_2: C58.2 C68.1 L5.1 | length 101.1
  Top Layer w10: L5.1 1162.36,178.63 C68.1
NetC59_1: C59.1 L6.2 R25.1 | length 105.9
  Top Layer w10: R25.1 1201.73,299.53 L6.2
NetC59_2: C59.2 L5.2 R22.1 | length 107.2
  Top Layer w10: L5.2 1162.36,298.91 R22.1
NetC60_1: C60.1 R26.2 U4.4 | length 93.2
  Top Layer w8: U4.4 1250.94,436.69 C60.1 1288.03,436.69 R26.2
NetC60_2: C60.2 R25.2 R26.1 U4.3 | length 158
  Top Layer w8: U4.3 1191.89,427.17 R25.2 1232.6,417.32 C60.2 1288.03,397.01 R26.1
NetC64_2: C64.2 R27.1 R29.2 U4.9 | length 317.9
  Top Layer w8: U4.9 1211.57,657.65 1268.14,714.22 1333.28,714.22 C64.2 ; R29.2@1343.15,763.46 C64.2 ; R27.1 1382.52,684.72 C64.2
NetC66_2: C66.2 C67.1 L3.1 | length 128.5
  Top Layer w8: C67.1 760.79,634.27 L3.1
NetR2_1: R2.1 USB1.1 | length 236.9
  Top Layer w15: 747.43,1615.41 USB1.1
  Top Layer w20: R2.1 645.93,1513.91 747.43,1615.41
NetR4_1: R4.1 U1.4 | length 68.8
  Top Layer w10: R4.1 210.93,1752.91 U1.4
NetR5_1: R5.1 R6.2 U1.3 | length 88.3
  Top Layer w10: R5.1 330.24,1796.91 R6.2 349.43,1777.73 U1.3
NetR10_1: R10.1 U7.9 | length 57.8
  Top Layer w10: U7.9 770.63,1058.55 796.22,1084.14 R10.1
NetR15_1: R15.1 U8.12 | length 58.6
  Top Layer w8: U8.12 798.07,224.09 R15.1
NetR24_1: R24.1 U4.12 | length 46.5
  Top Layer w8: R24.1 1150.55,594.17 U4.12
VSET: C71.2 C72.2 R30.1 R31.2 R32.2 U7.10 | length 198.4
  Top Layer w10: U7.10 750.94,1087.95 R31.2
  Bottom Layer w10: R32.2 813.56,1078.91 R30.1 ; C72.2 741.25,1077.96 C71.2
  other v1: 753.24,1075.91
VSYS: C8.2 L1.1 R2.2 R4.2 U1.5 | length 470.4
  Top Layer w10: v2(167.24,1737.91) 168.24,1736.91 R4.2 198.24,1736.91 220.24,1714.91 U1.5
  Bottom Layer w10: v2(167.24,1737.91) 217.24,1787.91 447.24,1787.91 462.24,1772.91 v2(462.24,1712.91)
pads on no net: U1.6 U6.3 U6.7 U7.22 U10.2 U11.2 USB1.2 USB1.3 USB1.4

## Polygon pours and split planes (outlines as drawn)
GND on Top Layer "Bottom Layer-No Net" (solid, remove dead copper, pour order 44): 1318.24,454.91 1318.24,661.91 1419.24,661.91 1419.24,454.91
5VB on Top Layer "Bottom Layer-No Net" (solid, remove dead copper, pour order 42): 1241.24,487.91 1274.24,454.91 1309.24,454.91 1309.24,701.91 1273.24,701.91 1241.24,669.91
GND on Top Layer "Bottom Layer-No Net" (solid, remove dead copper, pour order 40): 941.24,703.91 941.24,449.91 941.24,450.91 1058.24,450.91 1058.24,703.91
NetC53_2 on Top Layer "Bottom Layer-No Net" (solid, remove dead copper, pour order 38): 1035.24,699.91 1035.24,590.91 1064.24,561.91 1064.24,472.91 1064.24,466.91 1071.24,459.91 1088.24,459.91 1092.24,459.91 1124.24,491.91 1124.24,576.91 1098.24,602.91 1097.24,603.91 1097.24,699.91
GND on Top Layer "Bottom Layer-No Net" (solid, remove dead copper, pour order 32): 366.24,1450.91 976.24,1450.91 1011.24,1450.91 1011.24,1367.91 1011.24,1358.91 366.24,1358.91
GND on Top Layer "Bottom Layer-No Net" (solid, remove dead copper, pour order 30): 869.24,375.91 869.24,258.91 894.24,258.91 922.24,258.91 922.24,176.91 972.24,176.91 976.24,176.91 976.24,375.91
GND on Top Layer "Bottom Layer-No Net" (solid, remove dead copper, pour order 28): 612.24,376.91 612.24,262.91 600.24,262.91 591.24,253.91 592.24,252.91 592.24,50.91 526.24,50.91 526.24,377.91
NetC24_2 on Top Layer "Bottom Layer-No Net" (solid, remove dead copper, pour order 26): 831.24,258.91 846.24,243.91 846.24,240.91 846.24,138.91 864.24,120.91 911.24,120.91 911.24,220.91 880.24,251.91 864.24,251.91 857.24,258.91
5VA on Top Layer "Bottom Layer-No Net" (solid, remove dead copper, pour order 24): 628.24,373.91 657.24,373.91 683.24,347.91 683.24,258.91 683.24,209.91 657.24,183.91 616.24,183.91 616.24,255.91 626.24,265.91 626.24,373.91
NetC24_2 on Top Layer "Bottom Layer-No Net" (solid, remove dead copper, pour order 22): 806.24,347.91 832.24,373.91 850.24,373.91 857.24,373.91 857.24,258.91 831.24,258.91 817.24,272.91 806.24,272.91
-3.3V on Top Layer "Bottom Layer-No Net" (solid, remove dead copper, pour order 20): 788.24,1301.91 845.24,1301.91 862.24,1315.91 980.24,1315.91 980.24,1199.91 788.24,1199.91
NetC2_1 on Top Layer "Bottom Layer-No Net" (solid, remove dead copper, pour order 18): 672.24,1302.91 609.24,1302.91 586.24,1325.91 365.24,1325.91 357.24,1317.91 357.24,1278.91 357.24,1274.91 370.24,1261.91 602.24,1261.91 623.24,1282.91 624.24,1283.91 672.24,1283.91
5V-MIXER on Top Layer "Bottom Layer-No Net" (solid, remove dead copper, pour order 16): 457.24,1147.91 582.24,1147.91 582.24,1072.91 457.24,1072.91
5V on Top Layer "Bottom Layer-No Net" (solid, remove dead copper, pour order 12): 332.24,1197.91 332.24,1047.91 432.24,1047.91 432.24,1197.91
5V on Top Layer "Bottom Layer-No Net" (solid, remove dead copper, pour order 10): 95.43,1310.71 95.43,1133.54 154.49,1133.54 154.49,1310.71
NetC11_2 on Top Layer "Bottom Layer-No Net" (solid, remove dead copper, pour order 8): 83.62,1574.49 83.62,1472.13 103.31,1452.44 103.31,1393.39 150.55,1393.39 150.55,1456.38 134.8,1472.13 130.87,1476.06 130.87,1574.49
6V on Top Layer "Bottom Layer-No Net" (solid, remove dead copper, pour order 6): 75.75,1696.54 75.75,1586.3 138.74,1586.3 185.98,1539.06 233.23,1539.06 237.17,1539.06 260.79,1562.68 260.79,1649.29 158.43,1649.29 138.74,1668.98 138.74,1696.54
VSYS on Top Layer "Bottom Layer-No Net" (solid, remove dead copper, pour order 4): 394.65,1735.91 394.65,1692.6 394.65,1688.66 430.08,1653.23 430.08,1480 512.76,1480 512.76,1668.98 445.83,1735.91
NetC1_2 on Top Layer "Bottom Layer-No Net" (solid, remove dead copper, pour order 2): 272.6,1476.06 272.6,1570.55 319.84,1617.8 319.84,1692.6 378.9,1692.6 378.9,1476.06
GND on Bottom Layer "Bottom Layer-No Net" (solid, remove dead copper, pour order 34): -62.76,1946.91 -62.76,1950.91 1601.24,1950.91 1621.24,1950.91 1621.24,-48.09 1621.24,-37.09 -71.76,-37.09
GND on Internal Plane 1 (split plane): 1510.15,1830.59 1510.15,70.24 1472.92,33.01 59.57,33.01 22.34,70.24 22.34,1833.59 50.57,1861.82 1478.92,1861.82
5VB on Internal Plane 2 (split plane): 1361.99,461.48 1214.7,461.48 1214.7,711.12 1361.99,711.12
NetC53_2 on Internal Plane 2 (split plane): 1137.58,461.48 1041.48,461.48 1041.48,711.12 1137.58,711.12
-3.3V on Internal Plane 2 (split plane): 1110.02,735.1 1016.69,735.1 1014.74,734.71 1013.09,733.6 1011.98,731.95 1011.59,730 1011.59,107.15 946.99,107.15 946.99,196.54 946.99,1208.35 946.6,1210.3 945.49,1211.95 943.84,1213.06 941.89,1213.44 785.57,1213.44 785.57,1317.42 1110.02,1317.42
NetC24_2 on Internal Plane 2 (split plane): 936.79,196.54 936.79,111.08 785.57,111.08 785.57,384.35 936.79,384.35
5V-MIXER on Internal Plane 2 (split plane): 905.3,744.94 517.85,744.94 517.85,1152.07 905.3,1152.07
5VA on Internal Plane 2 (split plane): 708.45,79.59 604.47,79.59 604.47,392.22 708.45,392.22
GND on Internal Plane 2 (split plane): 1510.15,1830.59 1510.15,70.24 1472.92,33.01 59.57,33.01 22.34,70.24 22.34,1833.59 50.57,1861.82 1478.92,1861.82
5V on Internal Plane 2 (split plane): 1361.99,721.32 1214.7,721.32 1214.7,1346.14 1214.32,1348.09 1213.21,1349.75 1211.56,1350.85 1209.61,1351.24 481.26,1351.24 479.31,1350.85 477.65,1349.75 476.55,1348.09 476.16,1346.14 476.16,1243.78 476.16,397.32 476.55,395.37 477.65,393.72 479.31,392.61 481.26,392.22 594.27,392.22 594.27,79.59 324.94,79.59 324.94,1113.86 324.55,1115.81 323.45,1117.46 321.79,1118.57 319.84,1118.96 100.53,1118.96 100.53,1238.68 315.91,1238.68 317.86,1239.07 319.51,1240.17 320.62,1241.83 321,1243.78 321,1474.9 1361.99,1474.9

## Keep-outs
Keep-Out Layer:
  the board outline again, w6

## Other copper
Internal Plane 2 (plane layer: these items are gaps in the copper):
  lines w10: 941,389.45 780.47,389.45 780.47,105.98 941.89,105.98 ; 599.37,74.49 319.84,74.49 319.84,1113.86 95.43,1113.86 95.43,1243.78 315.91,1243.78 315.91,1480 1367.09,1480 1367.09,716.22 ; 599.37,74.49 713.54,74.49 713.54,397.32 599.37,397.32 ; 599.37,74.49 599.37,397.32 ; 599.37,397.32 481.26,397.32 481.26,1243.78 481.26,1346.14 1209.61,1346.14 1209.61,716.22 ; 1209.61,716.22 1209.61,456.38 1367.09,456.38 1367.09,716.22 ; 1209.61,716.22 1367.09,716.22 ; 512.76,739.84 512.76,1157.17 910.39,1157.17 910.39,739.84 512.76,739.84 ; 780.47,1208.35 941.89,1208.35 941.89,196.54 941.89,102.05 949.76,102.05 1016.69,102.05 1016.69,730 1115.12,730 1115.12,1322.52 780.47,1322.52 780.47,1208.35 ; 1036.38,456.38 1142.68,456.38 1142.68,716.22 1036.38,716.22 1036.38,456.38